# Altium PCB NSTRI.PcbDoc
Units mil, origin at the board's own origin, x right, y up, seen from the top; angles counter-clockwise.
Board outline 3582.68 x 2299.21 mil, 2 copper layers (Top Layer, Bottom Layer); 50 components, 49 nets, 246 pads, 54 vias.
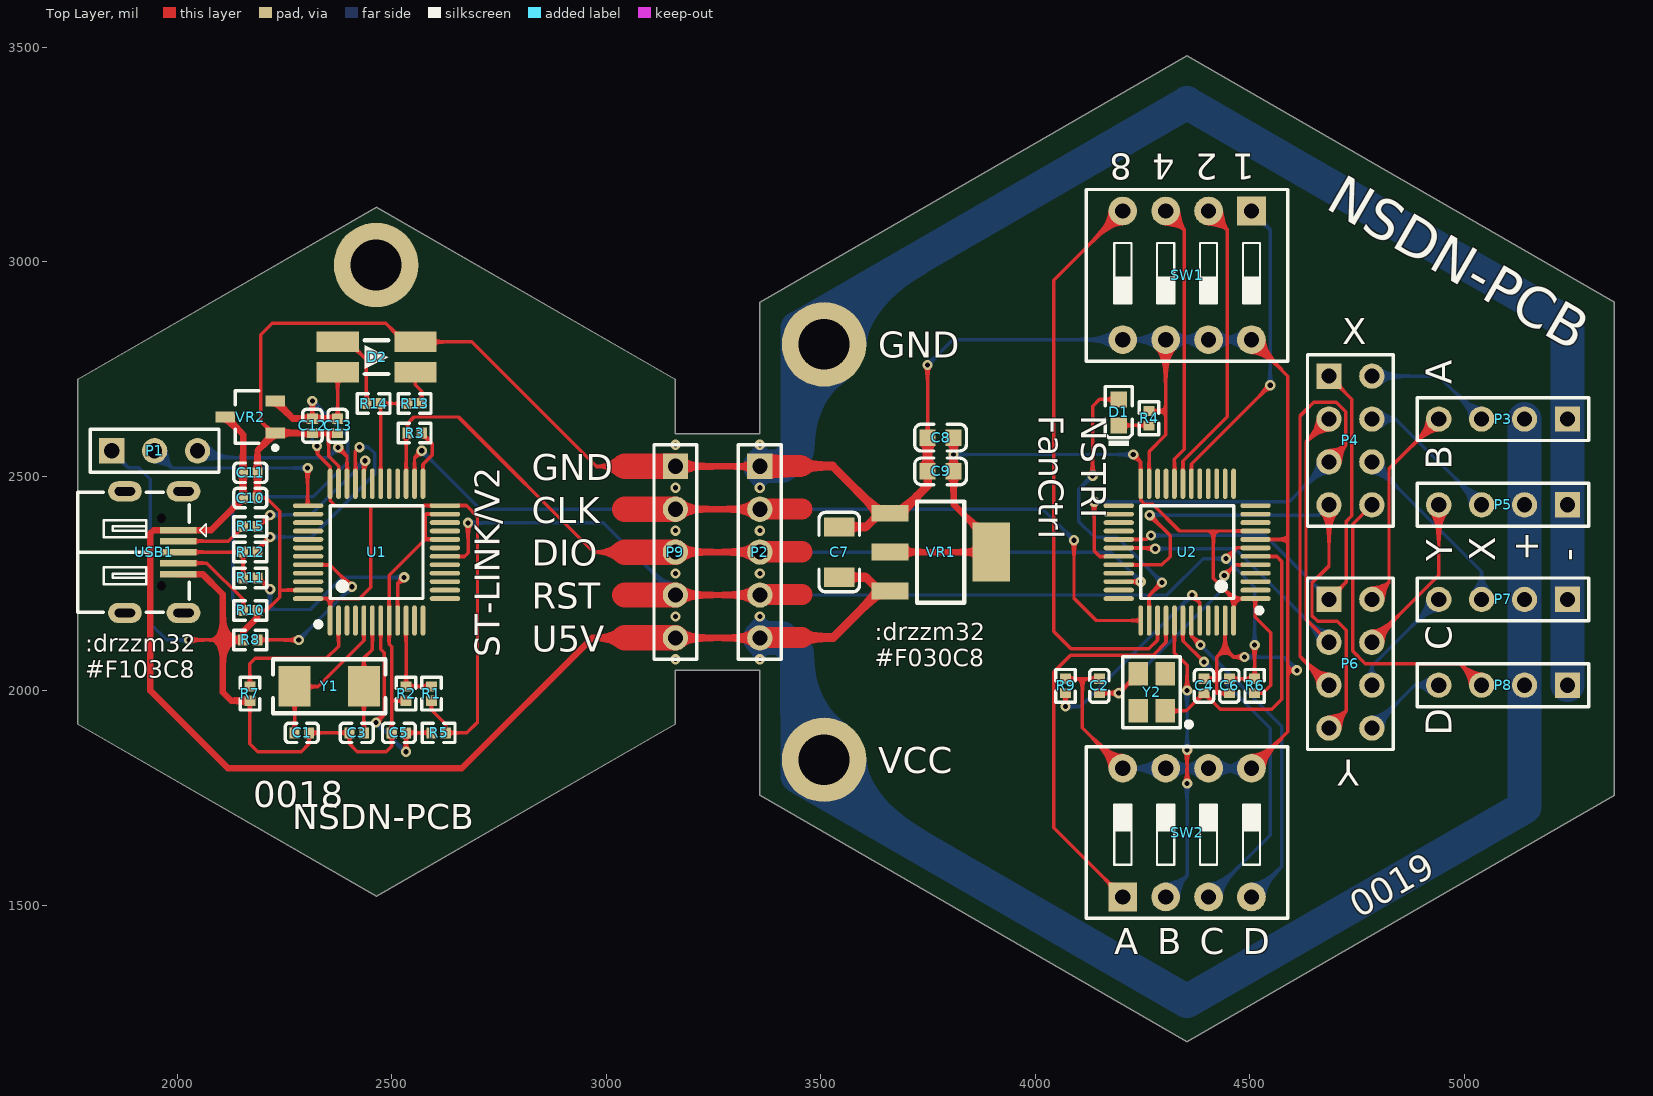
[diagram p0: Top Layer view]
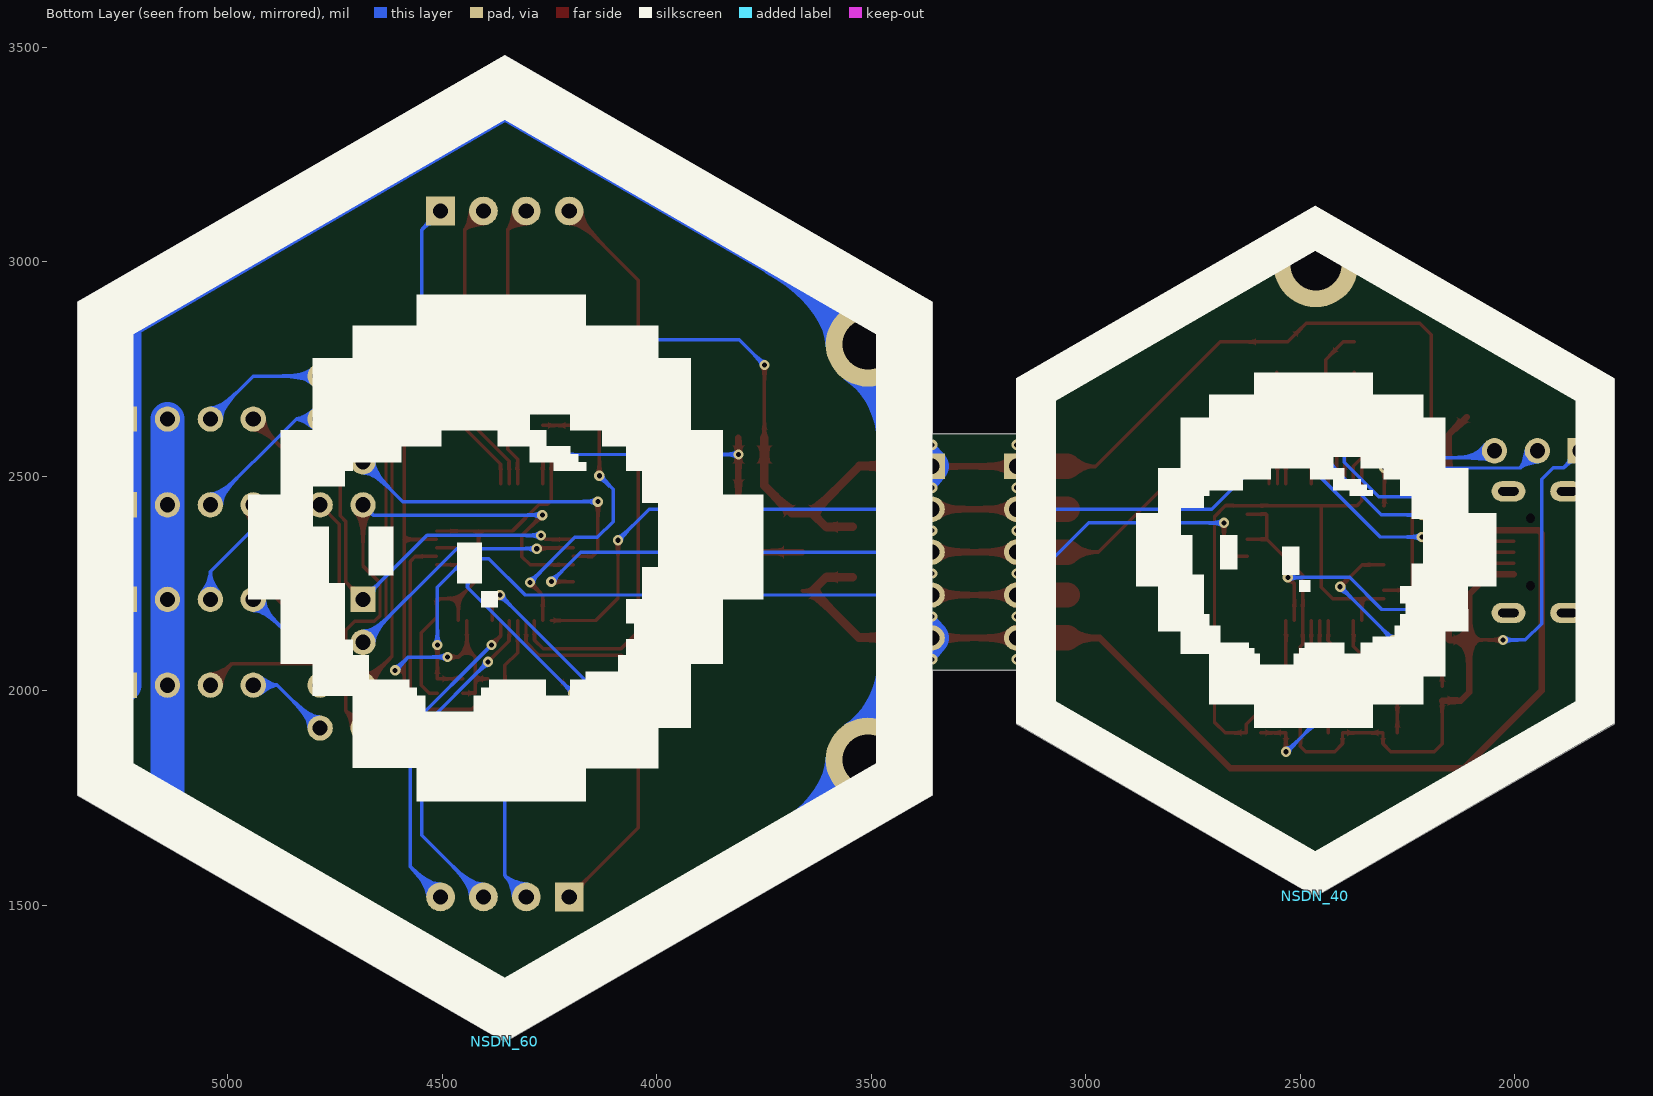
[diagram p1: Bottom Layer view, seen from below]
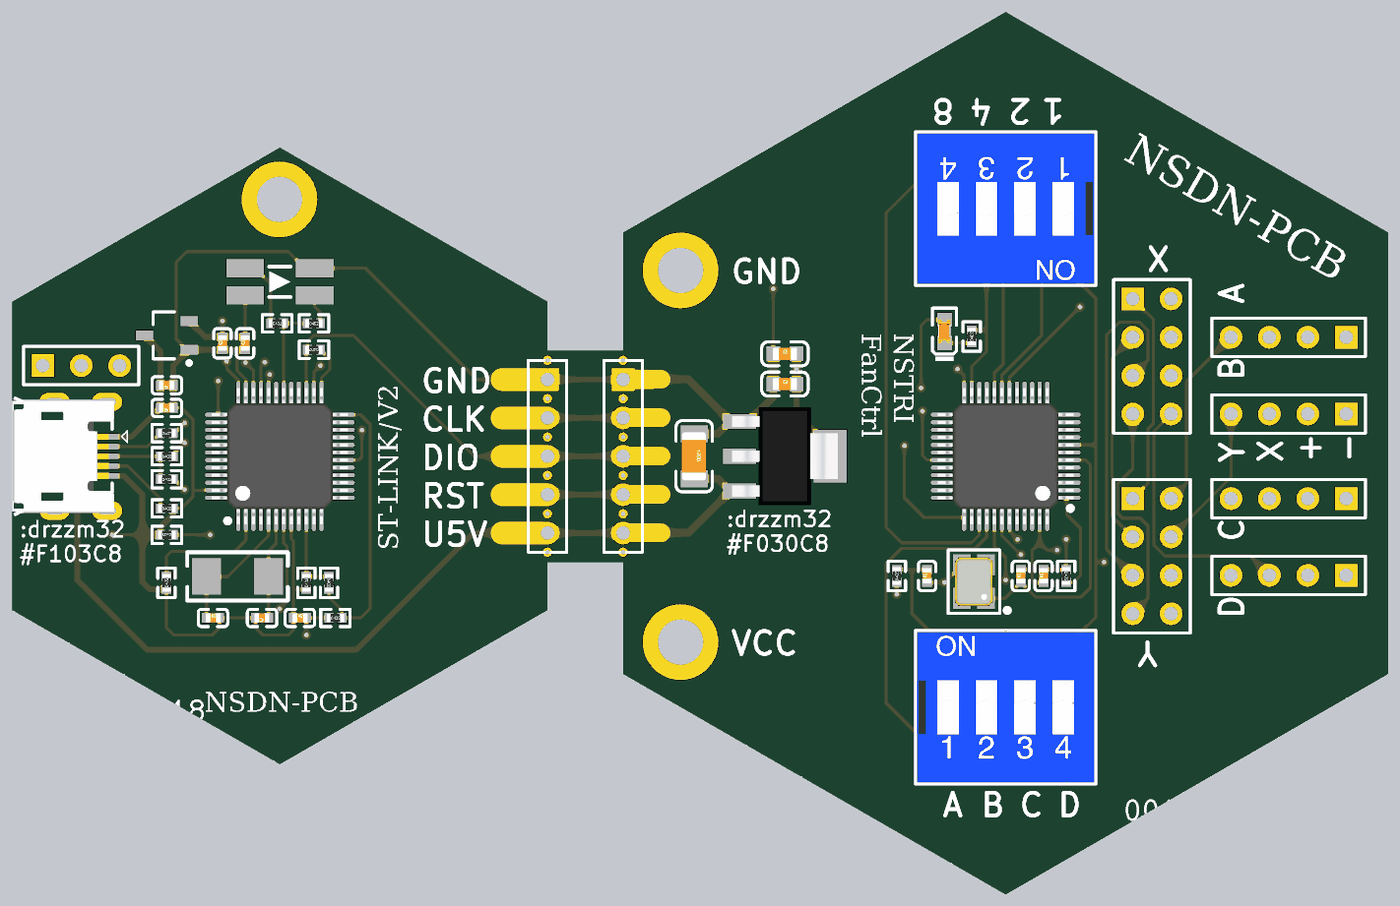
[diagram p2: 3D render of the assembled board from above, using the file's embedded part models]

## Layer stack, top to bottom
Top Solder: solder mask 0.4, Solder Resist, Dk 3.5
Top Layer: signal copper 1.4
Dielectric 1: dielectric 12.6, FR-4, Dk 4.8
Bottom Layer: signal copper 1.4
Bottom Solder: solder mask 0.4, Solder Resist, Dk 3.5

## Board outline
1767.72,1922.24 2464.57,1520.67 3161.42,1922.24 3161.42,2047.24 3358.27,2047.24 3358.27,1755.91 4354.33,1181.1 5350.39,1755.91 5350.39,2905.51 4354.33,3480.32 3358.27,2905.51 3358.27,2598.43 3161.42,2598.43 3161.42,2725.39 2464.57,3126.97 1767.72,2725.39

## Design rules (kind name [scope] priority, off if disabled: settings)
AssemblyTestpoint AssemblyTestpoint_4 [All] p2: testpointundercomponent=TRUE minsize=40 maxsize=100 preferedsize=60 minholesize=0 maxholesize=40 preferedholesize=32 testpointgrid=1 usegrid=TRUE gridtolerance=0.01 allowsidetop=TRUE allowsidebottom=TRUE
AssemblyTestpoint AssemblyTestpoint_3 [All] p3: testpointundercomponent=TRUE minsize=40 maxsize=100 preferedsize=60 minholesize=0 maxholesize=40 preferedholesize=32 testpointgrid=1 usegrid=TRUE gridtolerance=0.01 allowsidetop=TRUE allowsidebottom=TRUE
AssemblyTestpoint AssemblyTestpoint_2 [All] p4: testpointundercomponent=TRUE minsize=40 maxsize=100 preferedsize=60 minholesize=0 maxholesize=40 preferedholesize=32 testpointgrid=1 usegrid=TRUE gridtolerance=0.01 allowsidetop=TRUE allowsidebottom=TRUE
AssemblyTestpoint AssemblyTestpoint_1 [All] p5: testpointundercomponent=TRUE minsize=40 maxsize=100 preferedsize=60 minholesize=0 maxholesize=40 preferedholesize=32 testpointgrid=1 usegrid=TRUE gridtolerance=0.01 allowsidetop=TRUE allowsidebottom=TRUE
Clearance [All] p1: gap=6 ignorepadtopadclearanceinfootprint=FALSE
HoleSize [All] p1: absolutevalues=TRUE maxlimit=250 minlimit=11.81 maxpercent=80.000 minpercent=20.000
HoleToHoleClearance [All] p1: gap=18 allowstackedmicrovias=TRUE
MinimumSolderMaskSliver [All] p1: minsoldermaskwidth=6
PolygonConnect [All] p1: connectstyle=Relief reliefconductorwidth=10 reliefentries=4 polygonreliefangle="90 Angle" airgapwidth=10
RoutingCorners [All] p1: cornerstyle=Round minsetback=100 maxsetback=200
RoutingVias [All] p1: holewidth=12 width=24 viastyle="Through Hole" minholewidth=11.81 minwidth=23.62 maxholewidth=250 maxwidth=261.81
SilkToSilkClearance [All] p1: silktosilkclearance=6
SilkToSolderMaskClearance [IsPad] p1: minsilkscreentomaskgap=6 clearancetoexposedcopper=TRUE
SolderMaskExpansion [All] p1: expansion=2
UnRoutedNet [All] p1: checkbadconnections=TRUE
Width [All] p1: maxlimit=78.74 minlimit=6 preferedwidth=8
23 further rules are at their usual default settings.

## Components (designator, comment, footprint, x,y, rotation, side; value= is the part's Value field where it differs from the comment)
C1 "20pF (200) 5% 50V" 0402_C 2290.35,1901.58 r0 top
C2 "10pF (100) 5% 50V" 0402_C 4149.61,2010.83 r90 top
C3 "20pF (200) 5% 50V" 0402_C 2418.31,1901.58 r180 top
C4 "10pF (100) 5% 50V" 0402_C 4393.7,2010.83 r90 top
C5 "100nF (104) 10% 16V" 0402_C 2516.73,1901.58 r0 top
C6 "100nF (104) 10% 16V" 0402_C 4452.76,2010.83 r90 top
C7 "10uF (106) 10% 50V" 1206_C 3543.31,2322.83 r270 top
C8 "100nF (104) 10% 50V" 0603_C 3779.53,2589.76 r0 top
C9 "4.7uF (475) 10% 16V" 0603_C 3779.53,2511.02 r0 top
C10 "4.7uF (475) 20% 10V" 0402_C 2170.28,2448.82 r180 top
C11 "4.7uF (475) 20% 10V" 0402_C 2170.28,2507.87 r180 top
C12 "100nF (104) 10% 16V" 0402_C 2314.96,2617.13 r90 top
C13 "4.7uF (475) 20% 10V" 0402_C 2374.02,2617.13 r90 top
D1 "白灯 0603" 0603_LED_S1 4194.88,2648.43 r90 top
D2 "LED_BI" LED_BI 2464.57,2777.56 r180 top
NSDN_40 "Comment" NSDN_40mm_A 2464.57,1520.67 r180 bottom locked
NSDN_60 "Comment" NSDN_60MM 4354.29,1181.1 r180 bottom locked
P1 "STLK_SWD" HDR1X3 1847.24,2559.06 r0 top
P2 "TRI_CON" HDR1X5 3358.27,2522.83 r270 top
P3 "Fan1" HDR1X4 5240.94,2633.07 r180 top
P4 "Header 4X2" HDR2X4 4685.04,2733.07 r270 top
P5 "Fan2" HDR1X4 5240.94,2433.07 r180 top
P6 "Header 4X2" HDR2X4 4685.04,2212.6 r270 top
P7 "Fan3" HDR1X4 5240.94,2212.6 r180 top
P8 "Fan4" HDR1X4 5240.94,2012.6 r180 top
P9 "STLK_CON" HDR1X5 3161.42,2522.83 r270 top
R1 "4.7KΩ (4701) ±1%" 0402_R 2592.52,1993.11 r270 top
R2 "4.7KΩ (4701) ±1%" 0402_R 2533.46,1993.11 r90 top
R3 "100Ω (1000) ±1%" 0402_R 2553.15,2600.39 r180 top
R4 "1KΩ (1001) ±1%" 0402_R 4265.74,2634.84 r90 top
R5 "100KΩ (1003) ±1%" 0402_R 2609.25,1901.58 r0 top
R6 "100KΩ (1003) ±1%" 0402_R 4511.81,2010.83 r270 top
R7 "10KΩ (1002) ±1%" 0402_R 2169.29,1993.11 r90 top
R8 "100KΩ (1003) ±1%" 0402_R 2170.28,2118.11 r180 top
R9 "100KΩ (1003) ±1%" 0402_R 4070.87,2010.83 r90 top
R10 "100KΩ (1003) ±1%" 0402_R 2170.28,2187.01 r0 top
R11 "1.5KΩ (1501) ±1%" 0402_R 2170.28,2262.83 r0 top
R12 "22Ω (22R0) ±1%" 0402_R 2170.28,2322.83 r0 top
R13 "220Ω (2200) ±1%" 0402_R 2553.15,2669.29 r0 top
R14 "220Ω (2200) ±1%" 0402_R 2457.68,2669.29 r0 top
R15 "22Ω (22R0) ±1%" 0402_R 2170.28,2382.83 r0 top
SW1 "CSW-4P" "CSW DIP-4P" 4354.33,2968.11 r180 top
SW2 "CSW-4P" "CSW DIP-4P" 4354.33,1668.9 r0 top
U1 "STM32F103C8T6" LQFP-48_7x7x05P 2464.57,2322.83 r0 top
U2 "STM32F030C8T6" LQFP-48_7x7x05P 4354.33,2322.83 r90 top
USB1 "USB-5P" USB-MICRO_D 1877.95,2322.83 r270 top
VR1 "AMS1117-3.3" SOT-223 3779.53,2322.83 r180 top
VR2 "XC6206P332MR" SOT-23-3L 2170.28,2637.79 r0 top
Y1 "8MHz ±20ppm 20pF" SMD-5032_2P 2354.33,2009.84 r180 top
Y2 "16MHZ 9PF 10PPM" SMD-3225_4P 4271.65,1996.06 r90 top

## Footprints (in the part's own frame and the unit in brackets; to place one, negate y for a bottom-side part, rotate by r counter-clockwise, add the part's x,y. Pads: shape width x height; smd on the part's side, far side on the other; paste and mask are expansions set on the pad)
0402_C [mm]
  rect 0.6x0.65 smd mask+0.051: 1(-0.425,0) 2(0.425,0)
  silkscreen extent -0.98,-0.58 0.97,0.58, body extent -0.48,-0.3 0.52,0.3, height 0.2
0402_R [mm]
  rect 0.6x0.65 smd mask+0.051: 1(-0.425,0) 2(0.425,0)
  silkscreen extent -0.97,-0.57 0.98,0.58, body extent -0.57,-0.27 0.58,0.28, height 0.41
0603_C [mm]
  rect 0.93x0.98 smd: 1(-0.77,0) 2(0.77,0)
  silkscreen extent -1.54,-0.79 1.54,0.79, body extent -0.8,-0.4 0.8,0.4, height 0.3
0603_LED_S1 [mm]
  rect 0.93x0.98 smd: A(0.77,0) K(-0.77,0)
  silkscreen extent -1.98,-0.79 1.53,0.79, body extent -0.8,-0.4 0.8,0.4, height 0.6
1206_C [mm]
  rect 1.13x1.8 smd: 1(-1.49,0) 2(1.49,0)
  silkscreen extent -2.36,-1.2 2.36,1.2, body extent -1.6,-0.81 1.6,0.79, height 1
"CSW DIP-4P" [mm] "11.7*9.9*7mm"
  rect 1.7x1.7 hole 0.9: 1(-3.81,-3.81)
  round 1.7 hole 0.9: 2(-1.27,-3.81) 3(1.27,-3.81) 4(3.81,-3.81) 5(3.81,3.81) 6(1.27,3.81) 7(-1.27,3.81) 8(-3.81,3.81)
  silkscreen extent -5.97,-5.08 5.97,5.08, body extent -5.86,-4.95 5.86,4.95, height 6.65
HDR1X3 [mm] "Connector; Header; 3 Position"
  rect 1.5x1.5 hole 0.9: 1(0,0)
  round 1.5 hole 0.9: 2(2.54,0) 3(5.08,0)
  silkscreen extent -1.27,-1.27 6.35,1.27
HDR1X4 [mm] "Connector; Header; 4 Position"
  rect 1.5x1.5 hole 0.9: 1(0,0)
  round 1.5 hole 0.9: 2(2.54,0) 3(5.08,0) 4(7.62,0)
  silkscreen extent -1.27,-1.27 8.89,1.27
HDR1X5 [mm] "Connector; Header; 5 Position"
  rect 1.5x1.5 hole 0.9: 1(0,0)
  round 1.5 hole 0.9: 2(2.54,0) 3(5.08,0) 4(7.62,0) 5(10.16,0)
  silkscreen extent -1.27,-1.27 11.43,1.27
HDR2X4 [mm] "Connector; Header; 4x2 Position"
  rect 1.5x1.5 hole 0.9: 1(0,0)
  round 1.5 hole 0.9: 2(0,2.54) 3(2.54,0) 4(2.54,2.54) 5(5.08,0) 6(5.08,2.54) 7(7.62,0) 8(7.62,2.54)
  silkscreen extent -1.27,-1.27 8.89,3.81
LED_BI [mm]
  rect 2.5x1.2 smd: 1(-2.3,0.9) 2(2.3,0.9) 3(2.3,-0.9) 4(-2.3,-0.9)
  silkscreen extent -0.7,-1 0.7,1
LQFP-48_7x7x05P [mm]
  oval 0.28x1.8 smd mask+0.051: 1(-2.75,-4.05) 2(-2.25,-4.05) 3(-1.75,-4.05) 4(-1.25,-4.05) 5(-0.75,-4.05) 6(-0.25,-4.05) 7(0.25,-4.05) 8(0.75,-4.05) 9(1.25,-4.05) 10(1.75,-4.05) 11(2.25,-4.05) 12(2.75,-4.05) 25(2.75,4.05) 26(2.25,4.05) 27(1.75,4.05) 28(1.25,4.05) 29(0.75,4.05) 30(0.25,4.05) 31(-0.25,4.05) 32(-0.75,4.05) 33(-1.25,4.05) 34(-1.75,4.05) 35(-2.25,4.05) 36(-2.75,4.05)
  oval 1.8x0.28 smd mask+0.051: 13(4.05,-2.75) 14(4.05,-2.25) 15(4.05,-1.75) 16(4.05,-1.25) 17(4.05,-0.75) 18(4.05,-0.25) 19(4.05,0.25) 20(4.05,0.75) 21(4.05,1.25) 22(4.05,1.75) 23(4.05,2.25) 24(4.05,2.75) 37(-4.05,2.75) 38(-4.05,2.25) 39(-4.05,1.75) 40(-4.05,1.25) 41(-4.05,0.75) 42(-4.05,0.25) 43(-4.05,-0.25) 44(-4.05,-0.75) 45(-4.05,-1.25) 46(-4.05,-1.75) 47(-4.05,-2.25) 48(-4.05,-2.75)
  silkscreen extent -3.6,-4.42 2.75,2.75, body extent -4.5,-4.5 4.5,4.5, height 1.6
NSDN_40mm_A [mil]
  Top Layer region: -697,403
  Top Layer keep-out region: 0,0
  silkscreen extent -698,0 697,1610
NSDN_60MM [mil]
  silkscreen extent -996,0 996,2300
SMD-3225_4P [mm]
  rect 1.4x1.15 smd: 1(-1.1,-0.8) 2(1.1,-0.8) 3(1.1,0.8) 4(-1.1,0.8)
  silkscreen extent -2.1,-2.35 2.1,1.7, body extent -1.6,-1.25 1.6,1.25, height 0.61
SMD-5032_2P [mm]
  rect 1.9x2.4 smd: 1(-2.05,0) 2(2.05,0)
  silkscreen extent -3.32,-1.6 3.32,1.6
SOT-23-3L [mm] "http://www.aosmd.com/res/packaging_information/SOT-23-3L.pdf"
  rect 1.15x0.65 smd: 1(1.475,-0.95) 2(1.475,0.95) 3(-1.475,0)
  silkscreen extent -0.9,-1.95 1.6,1.55, body extent -0.9,-1.55 0.9,1.55, height 1.25
SOT-223 [mm]
  rect 2.2x1 smd: 1(3,-2.3) 2(3,0) 3(3,2.3)
  rect 2.2x3.5 smd: 2(-3,0)
  silkscreen extent -1.4,-3 1.4,3, body extent -3.49,-3.24 3.49,3.24, height 1.64
USB-MICRO_D [mm] "micro型USB ，6.7*7.5*2.5mm"
  oval 1.2x2 hole 0.5 slot 1.2 at 90 deg: 0(-3.6,3.47) 0(-3.6,0) 0(3.6,3.47) 0(3.6,0)
  round 0 hole 0.55 unplated: 0(-2,2.17) 0(2,2.17)
  rect 0.381x2.15 smd: 1(-1.3,3.16) 2(-0.65,3.16) 3(0,3.16) 4(0.65,3.16) 5(1.3,3.16)
  silkscreen extent -3.56,-2.79 3.56,4.81, body extent -3.99,-2.75 3.99,3.95, height 2.79

## Part data
C1 C3: library part "0402 20pF (200) 5% 50V", "贴片电容", Package=0402, SuppliersPartNumber=C1554, ComponentLink1Description=供应商, ComponentLink1URL=http://www.szlcsc.com/product/details_1906.html, Supplier=LC
C2 C4: library part "0402 10pF (100) 5% 50V", "贴片电容", Package=0402, SuppliersPartNumber=C32949, ComponentLink1Description=供应商, ComponentLink1URL=http://www.szlcsc.com/product/details_33914.html, Supplier=LC
C5 C6 C12: library part "0402 100nF (104) 10% 16V", "贴片电容", Package=0402, SuppliersPartNumber=C1525, ComponentLink1Description=供应商, ComponentLink1URL=http://www.szlcsc.com/product/details_1877.html, Supplier=LC
C7: library part "1206 10uF (106) 10% 50V", "贴片电容", Package=1206, SuppliersPartNumber=C13585, ComponentLink1Description=供应商, ComponentLink1URL=http://www.szlcsc.com/product/details_14236.html, Supplier=LC
C8: library part "0603 100nF (104) 10% 50V", "贴片电容", Package=0603, SuppliersPartNumber=C14663, ComponentLink1Description=供应商, ComponentLink1URL=http://www.szlcsc.com/product/details_15331.html, Supplier=LC
C9: library part "0603 4.7uF (475) 10% 16V", "贴片电容", Package=0603, SuppliersPartNumber=C19666, ComponentLink1Description=供应商, ComponentLink1URL=http://www.szlcsc.com/product/details_20375.html, Supplier=LC
C10 C11 C13: library part "0402 4.7uF (475) 20% 10V", "贴片电容", Package=0402, SuppliersPartNumber=C23733, ComponentLink1Description=供应商, ComponentLink1URL=http://www.szlcsc.com/product/details_24469.html, Supplier=LC
D1: library part "0603 白灯", "发光二极管", Package=0603, SuppliersPartNumber=C2290, ComponentLink1Description=供应商, ComponentLink1URL=http://www.szlcsc.com/product/details_2663.html, Supplier=LC
P1: library part "Header 3", "Header, 3-Pin", LatestRevisionDate=17-Jul-2002, LatestRevisionNote="Re-released for DXP Platform.", Publisher="Altium Limited"
P2 P9: library part "Header 5", "Header, 5-Pin", LatestRevisionDate=17-Jul-2002, LatestRevisionNote="Re-released for DXP Platform.", Publisher="Altium Limited"
P3 P5 P7 P8: library part "Header 4", "Header, 4-Pin", LatestRevisionDate=17-Jul-2002, LatestRevisionNote="Re-released for DXP Platform.", Publisher="Altium Limited"
P4 P6: "Header, 4-Pin, Dual row", LatestRevisionDate=17-Jul-2002, LatestRevisionNote="Re-released for DXP Platform.", Publisher="Altium Limited"
R1 R2: library part "0402 4.7KΩ (4701) 1%", "贴片电阻", Package=0402, SuppliersPartNumber=C25900, ComponentLink1Description=供应商, ComponentLink1URL=http://www.szlcsc.com/product/details_26643.html, Supplier=LC
R3: library part "0402 100Ω (1000) 1%", "贴片电阻", Package=0402, SuppliersPartNumber=C25076, ComponentLink1Description=供应商, ComponentLink1URL=http://www.szlcsc.com/product/details_25819.html, Supplier=LC
R4: library part "0402 1KΩ (1001) 1%", "贴片电阻", Package=0402, SuppliersPartNumber=C11702, ComponentLink1Description=供应商, ComponentLink1URL=http://www.szlcsc.com/product/details_12256.html, Supplier=LC
R5 R6 R8 R9 R10: library part "0402 100KΩ (1003) 1%", "贴片电阻", Package=0402, SuppliersPartNumber=C25741, ComponentLink1Description=供应商, ComponentLink1URL=http://www.szlcsc.com/product/details_26484.html, Supplier=LC
R7: library part "0402 10KΩ (1002) 1%", "贴片电阻", Package=0402, SuppliersPartNumber=C25744, ComponentLink1Description=供应商, ComponentLink1URL=http://www.szlcsc.com/product/details_26487.html, Supplier=LC
R11: library part "0402 1.5KΩ (1501) 1%", "贴片电阻", Package=0402, SuppliersPartNumber=C25867, ComponentLink1Description=供应商, ComponentLink1URL=http://www.szlcsc.com/product/details_26610.html, Supplier=LC
R12 R15: library part "0402 22Ω (22R0) 1%", "贴片电阻", Package=0402, SuppliersPartNumber=C25092, ComponentLink1Description=供应商, ComponentLink1URL=http://www.szlcsc.com/product/details_25835.html, Supplier=LC
R13 R14: library part "0402 220Ω (2200) 1%", "贴片电阻", Package=0402, SuppliersPartNumber=C25091, ComponentLink1Description=供应商, ComponentLink1URL=http://www.szlcsc.com/product/details_25834.html, Supplier=LC
SW1 SW2: "4路编码开关", BOM名称=4路编, 学习资源=www.ooocke.
U1 U2: "ARM", Package=LQFP-48_7x7x05P, SuppliersPartNumber=C8734, ComponentLink1Description=供应商, ComponentLink1URL=http://www.szlcsc.com/product/details_9243.html, Supplier=LC
USB1: "微型USB母座", BOM名称=微型US, 学习资源=www.ooocke.
VR1: library part "SOT-223 AMS1117-3.3", "低压差线性稳压(LDO)", Package=SOT-223, SuppliersPartNumber=C6186, ComponentLink1Description=供应商, ComponentLink1URL=http://www.szlcsc.com/product/details_6652.html, Supplier=LC
VR2: library part "SOT-23 XC6206P332MR", "低压差线性稳压(LDO)", Package=SOT-23, SuppliersPartNumber=C5446, ComponentLink1Description=供应商, ComponentLink1URL=http://www.szlcsc.com/product/details_5896.html, Supplier=LC
Y1: library part "SMD-5032_2P 8MHz 20ppm 20pF", "贴片晶振", Package=SMD-5032_2P, SuppliersPartNumber=C115962, ComponentLink1Description=供应商, ComponentLink1URL=http://www.szlcsc.com/product/details_117214.html, Supplier=LC
Y2: library part "SMD-3225_4P  16MHZ 9PF 10PPM", "贴片晶振", Package=SMD-3225_4P, SuppliersPartNumber=C13738, ComponentLink1Description=供应商, ComponentLink1URL=http://www.szlcsc.com/product/details_14393.html, Supplier=LC

## Free pads (board coordinates)
  round 196.85 hole 118.11: ""(2463.5,2992.13) ""(3507.87,1838.58) ""(3507.87,2807.09)

## Via types
v1: diameter 24, hole 12, Top Layer to Bottom Layer, tented both sides, 42 vias
v2: diameter 24, hole 12, Top Layer to Bottom Layer, 12 vias

## Nets (pads, with @x,y where several pads share a name; then routed paths per layer and width w, separated by ;. In a path a pad name is that pad's centre, name@x,y a point inside that pad or via, vN(x,y) a via of type N, cw(c..) or ccw(c..) an arc to the next point about the centre after c; other vN are vias at no path point)
3V3: C12.2 C13.2 D2.2 R1.2 R5.2 R11.2 U1.1 U1.9 U1.24 U1.36 U1.48 VR2.2 | length 3376.6
  Top Layer w8: R11.2 2189.92,2262.83 v1(2216.54,2236.22) ; U1.48 2356.3,2214.57 ; v1(2314.96,2675.2) C12.2 C13.2 D2.2 ; v1(2326,2570) 2326.5,2570 2327,2569.5 2327,2550.61 2356.3,2521.31 U1.36 2356.3,2442.47 2367.67,2431.1 2450.79,2431.1 ; U1.1 2356.3,2214.57 ; U1.9 2513.78,2248.78 v1(2529,2264) ; R1.2 2592.52,1955.46 2625.98,1922 R5.2 2675,1901.58 2700,1926.58 2700,2405.51 2674.41,2431.1 U1.24 2451,2431.1 2451,2241.35 2424.22,2214.57 2356.3,2214.57
  Top Layer w15: VR2.2 2269.69,2633.86 C12.2 C13.2
  Bottom Layer w8: v1(2216.54,2236.22) 2216.54,2189 ; v1(2326,2570) 2314.96,2581.04 v1(2314.96,2675.2) 2397,2593.15 2397,2532 2317,2452 2143.5,2452 2129,2437.5 2129,2210 2150,2189 2216.54,2189 ; v1(2529,2264) 2385,2264 2310,2189 2216.54,2189
F030_CLK: P2.2 P9.2 U1.26 U2.37 | length 2219.7
  Top Layer w8: U1.26 2553.15,2542.32 v1(2569.88,2559.06) ; v1(4090.55,2350.39) 4090.55,2214.83 4142,2163.39 U2.37
  Top Layer w15: P9.2 P2.2
  Top Layer w49.21: P2.2@3358.27,2423.62 3456.69,2423.62
  Top Layer w59.06: 3043.31,2422.83 P9.2
  Bottom Layer w8: v1(2569.88,2559.06) 2706.1,2422.83 P9.2 ; P2.2 4018.11,2422.83 v1(4090.55,2350.39)
F030_DIO: P2.3 P9.3 R3.2 U1.27 U2.34 | length 2165.7
  Top Layer w8: U1.27 2533.46,2597.44 R3.2 2536.42,2622.24 2551.97,2637.8 2655.64,2637.8 2970.6,2322.83 3043.31,2322.83 ; U2.34 v1(4246,2253.94)
  Top Layer w15: P9.3 P2.3
  Top Layer w49.21: P2.3@3358.27,2323.62 3456.69,2323.62
  Top Layer w59.06: 3043.31,2322.83 P9.3
  Bottom Layer w8: P2.3 4177.1,2322.83 v1(4246,2253.94)
F030_LED: D1.A U2.38 | length 703.6
  Top Layer w8: v1(4134,2501) 4134,2662.74 4150,2678.74 D1.A ; U2.38 4265.75,2221.75 v1(4296,2252)
  Bottom Layer w8: v1(4134,2501) 4102,2469 4102,2393.77 4138.77,2357 4191,2357 v1(4296,2252)
F030_RST: C6.2 P2.4 P9.4 R6.1 U1.18 U2.7 | length 2649.7
  Top Layer w8: U1.18 2670,2312.99 2678,2320.99 v1(2678,2391) ; v1(4445.18,2307.68) 4470.18,2332.68 U2.7 ; C6.2 R6.1 4511.81,2066.82 4511.7,2066.93 v1(4511.7,2106.3)
  Top Layer w15: P9.4 P2.4
  Top Layer w49.21: P2.4@3358.27,2223.62 3456.69,2223.62
  Top Layer w59.06: 3043.31,2222.83 P9.4
  Bottom Layer w8: v1(2678,2391) 2993.25,2391 P9.4 ; P2.4 4306.61,2222.83 4391.45,2307.68 v1@4433.32,2307.68 ; v1(4445.18,2307.68) 4511.7,2241.16 v1(4511.7,2106.3)
GND: C1.2 C2.2 C3.2 C4.2 C5.1 C6.1 C7.1 C8.1 C9.1 C10.1 C11.1 C12.1 C13.1 D2.4 P1.1 P2.1 P3.1 P5.1 P7.1 P8.1 P9.1 pad.@3507.87,2807.09 R2.1 R4.2 R7.1 R8.2 R9.2 R10.2 SW1.5 SW1.6 SW1.7 SW1.8 SW2.5 SW2.6 SW2.7 SW2.8 U1.8 U1.20 U1.23 U1.35 U1.47 U2.8 U2.23 U2.47 USB1.5 VR1.1 VR2.1 | length 12809.7
  Top Layer w8: v1(2027.56,2118.11) 2106.3,2118.11 R8.2@2142.5,2118.11 ; 2150,1976.38 R7.1 2169.29,1875.98 2187.78,1857.5 2288.6,1857.5 2307.09,1875.98 C1.2 C3.2 2401.57,1875.98 2420.06,1857.5 2487.5,1857.5 2500,1870 C5.1 2500,2102.36 2494.09,2108.27 U1.8 2494.09,2268.46 2578.5,2352.86 ; R10.2 2208,2187.01 2238.54,2217.54 2238.54,2234.25 U1.47 ; C10.1 2208.28,2448.82 2238.54,2418.56 2238.54,2236.24 ; C11.1 2187.01,2559.05 ; VR2.1@2223,2600 2195,2628 2195,2829.5 2221.8,2856.3 2486.22,2856.3 2529.53,2812.99 D2.4 2687.01,2812.99 2977.17,2522.83 3043.31,2522.83 ; VR2.1@2237.61,2600.39 C12.1 2353,2600.39 ; C13.1 2353,2600.39 ; U1.35 2375.98,2523.02 2353,2546 2353,2600.39 ; 2501,1976.38 R2.1 ; U1.23 2579,2411.42 2578,2410.42 2578,2353.36 ; C9.1 C8.1 v1(3749.21,2759.21) ; R9.2 4110.24,2027.56 ; C2.2 4110.24,2027.56 ; SW2.8 4110.24,1912.99 4110.24,2027.56 ; U2.23 4265.75,2557.42 4304.33,2596 4304.33,2651.57 ; R4.2 4304.33,2651.57 ; SW1.6 4304.33,2651.57 ; C4.2 4423.23,2027.56 ; U2.47 4442.91,2097.91 ; C6.1 4423.23,1994.09 4423.23,2027.56 ; v1(4488.19,2078.23) 4462.6,2078.23 4442.91,2097.91 ; SW2.5 4589.22,1903.78 4589.22,2047.24 ; SW1.8 4589.22,2733.22 4589.22,2352.36 ; U2.8 4589.22,2352.36 ; v1(4610.24,2047.24) 4589.22,2047.24 ; 2578,2353.36 2578.5,2352.86 ; 2578,2353.36 U1.20 2579,2352.36 2578.5,2352.86 ; 4423.23,2027.56 4423.23,2078.23 4442.91,2097.91 ; 4589.22,2047.24 4589.22,2352.36
  Top Layer w15: USB1.5 2059.06,2271.65 2106.3,2224.41 2106.3,2118.11 ; R7.1 2125.98,1976.38 2106.3,1996.06 2106.3,2118.11 ; R10.2 2187.01,2171.26 2153.54,2137.8 R8.2 2106.3,2118.11 ; C10.1 C11.1 2187.01,2559.05 VR2.1 C12.1 C13.1 ; P9.1 P2.1
  Top Layer w20: 3456.69,2523.62 3527.56,2523.62 VR1.1@3637.8,2413.39 ; C7.1 3605.91,2381.5 VR1.1@3637.8,2413.39 ; C8.1 C9.1 3749.21,2477.56 3685.04,2413.39 VR1.1 VR1.1@3637.8,2413.39
  Top Layer w49.21: P2.1@3358.27,2523.62 3456.69,2523.62
  Top Layer w59.06: 3043.31,2522.83 P9.1
  Bottom Layer w8: P1.1 1847.24,2558.27 1885.83,2519.68 1910.45,2519.68 1937.01,2493.13 1937.01,2156.3 1975.2,2118.11 v1(2027.56,2118.11) ; v1(3749.21,2759.21) 3808.11,2818.11 SW1.5 SW1.6 SW1.7 SW1.8 ; SW2.8 SW2.7 SW2.6 SW2.5 ; v1(4488.19,2078.23) 4579.25,2078.23 v1(4610.24,2047.24)
  Bottom Layer w15: v2(3358.27,2472.83) P2.1 v2(3358.27,2572.83)
  Bottom Layer w78.74: P2.1 3409.45,2522.83 3444.25,2557.64 3444.25,2558.27 ; 3444.57,2557.96 3444.25,2558.27 ; pad.@3445.64,2845.5 3445.64,2559.66 3444.25,2558.27 ; pad.@3445.92,2845.5 4354.33,3370.08 5240.94,2857.32 P3.1 P5.1 P7.1 P8.1
NetC1_1: C1.1 U1.5 Y1.2 | length 361.3
  Top Layer w8: C1.1 Y1.2@2273.62,2009 ; Y1.2 Y1.2@2273.62,2009 ; U1.5 2435.04,2116.14 2327.9,2009 Y1.2@2273.62,2009
NetC2_1: C2.1 U2.5 Y2.3 | length 568.4
  Top Layer w8: C2.1 v1(4194.88,1994.09) Y2.3 ; v1(4441,2268) 4466.31,2293.31 U2.5
  Bottom Layer w8: v1(4194.88,1994.09) 4441,2240.21 v1(4441,2268)
NetC3_1: C3.1 U1.6 Y1.1 | length 270
  Top Layer w8: C3.1 Y1.1 2435.04,2076 2454.72,2095.68 U1.6
NetC4_1: C4.1 U2.6 Y2.1 | length 701.7
  Top Layer w8: Y2.1 4352.36,1952.76 C4.1 4431.61,1956.18 4551.18,1956.18 4575,1980 4575,2300.99 4563,2312.99 U2.6
NetC5_2: C5.2 R5.1 U1.7 | length 451.1
  Top Layer w8: v1(2463.5,1925.5) 2483,1945 2483,2087.87 2474.41,2096.46 U1.7 ; v1(2533.46,1857.28) C5.2 R5.1
  Bottom Layer w8: v1(2463.5,1925.5) 2531.72,1857.28 v1(2533.46,1857.28)
NetD1_K: D1.K R4.1 | length 70.9
  Top Layer w8: D1.K R4.1
NetD2_1: D2.1 R13.2 | length 78.9
  Top Layer w8: D2.1 2555.12,2712.76 2569.88,2698 R13.2
NetD2_3: D2.3 R14.1 | length 186.4
  Top Layer w8: D2.3 2399.61,2812.99 2440.94,2771.65 R14.1
NetP3_3: P3.3 P4.2 | length 297.3
  Bottom Layer w8: P4.2 4940.94,2733.07 P3.3
NetP3_4: P3.4 P6.2 | length 485
  Top Layer w8: P6.2 4825,2252.56 4825,2517.13 P3.4
NetP4_4: P4.4 P5.3 | length 338.7
  Bottom Layer w8: P4.4 4840.94,2633.07 P5.3
NetP4_6: P4.6 P7.3 | length 426.5
  Bottom Layer w8: P4.6 5040.94,2277.17 P7.3
NetP4_8: P4.8 P8.3 | length 693.1
  Top Layer w8: P4.8 4740.16,2388.19 4740.16,2092.34 4769.51,2062.99 4990.55,2062.99 P8.3
NetP5_4: P5.4 P6.4 | length 385
  Top Layer w8: P6.4 4940.94,2268.5 P5.4
NetP6_6: P6.6 P7.4 | length 264.6
  Bottom Layer w8: P6.6 4785.04,2056.69 P7.4
NetP6_8: P6.8 P8.4 | length 197.3
  Bottom Layer w8: P6.8 4885.04,2012.6 P8.4
NetR1_1: R1.1 R2.2 U1.10 | length 212.6
  Top Layer w8: U1.10 R2.2 R1.1
NetR3_1: R3.1 U1.25 | length 137.3
  Top Layer w8: R3.1 2594.49,2575.79 2594.49,2549.21 2572.83,2527.56 U1.25
NetR7_2: R7.2 U1.2 | length 336.2
  Top Layer w8: R7.2 2169.29,2062.5 2181.79,2075 2347.5,2075 2375.98,2103.48 U1.2
NetR8_1: R8.1 U1.44 | length 394.4
  Top Layer w8: R8.1 v1(2283.11,2118.11) ; U1.44 2355.69,2293.31 v1(2407,2242)
  Bottom Layer w8: v1(2283.11,2118.11) v1(2407,2242)
NetR9_1: R9.1 U2.44 | length 500.9
  Top Layer w8: v1(4070.87,1963) R9.1 ; v1(4366,2223) 4383.86,2205.14 U2.44
  Bottom Layer w8: v1(4070.87,1963) 4106,1963 v1(4366,2223)
NetR10_1: R10.1 USB1.4 | length 211.8
  Top Layer w8: USB1.4 2068.9,2297.24 2153.54,2212.6 R10.1
NetR11_1: R11.1 R12.1 USB1.3 | length 211.2
  Top Layer w8: USB1.3 R12.1 R11.1
NetR15_1: R15.1 USB1.2 | length 165.4
  Top Layer w8: USB1.2 2119.13,2348.43 R15.1
NetSW1_1: SW1.1 U2.18 | length 730.1
  Top Layer w8: U2.18 4364.17,2528 v1(4548,2711.83)
  Bottom Layer w8: SW1.1 4548,3074.44 v1(4548,2711.83)
NetSW1_2: SW1.2 U2.19 | length 696.8
  Top Layer w8: U2.19 4344.49,2534.49 4448,2638 4448,3074.44 SW1.2
NetSW1_3: SW1.3 U2.20 | length 663.5
  Top Layer w8: SW1.3 4348,3074.44 4348,2563 4324.8,2539.8 U2.20
NetSW1_4: SW1.4 U2.39 | length 1359.7
  Top Layer w8: SW1.4 4043.31,2957.09 4043.31,2137.8 4083.62,2097.48 4264.92,2097.48 4285.43,2118 U2.39
NetSW2_1: SW2.1 U2.40 | length 932.5
  Top Layer w8: SW2.1 4043.31,1679.92 4043.31,2043.31 4082.5,2082.5 4275.12,2082.5 4305.12,2112.5 U2.40
NetSW2_2: SW2.2 U2.41 | length 677.4
  Top Layer w8: U2.41 4324.8,2088.2 4354.33,2058.67 v1(4354.33,2000) ; v1(4354.33,1783.46) v1(4354.33,1862.2)
  Bottom Layer w8: SW2.2 4354.33,1568.9 v1(4354.33,1783.46) ; v1(4354.33,1862.2) v1(4354.33,2000)
NetSW2_3: SW2.3 U2.42 | length 788.3
  Top Layer w8: U2.42 4344.49,2116.14 v1(4393.7,2066.93)
  Bottom Layer w8: v1(4393.7,2066.93) 4548,1912.63 4548,1662.57 SW2.3
NetSW2_4: SW2.4 U2.43 | length 760.9
  Top Layer w8: U2.43 4364.17,2127.57 v1(4385.44,2106.3)
  Bottom Layer w8: v1(4385.44,2106.3) 4574.8,1916.94 4574.8,1589.37 SW2.4
PWM_CH1: P4.1 P6.1 U2.29 | length 1120.7
  Top Layer w8: U2.29 4260.58,2352.36 v1(4270,2361.78) ; P6.1 4725,2252.56 4725,2394.29 4738.57,2407.86 4738.57,2679.54 P4.1
  Bottom Layer w8: v1(4270,2361.78) 4535.86,2361.78 P6.1
PWM_CH2: P4.3 P6.3 U2.30 | length 1146.1
  Top Layer w8: U2.30 4278.03,2332.68 v1(4280,2330.71) ; P6.3 4631.51,2166.13 4631.51,2579.54 P4.3
  Bottom Layer w8: v1(4280,2330.71) 4466.93,2330.71 P6.3
PWM_CH3: P4.5 P6.5 U2.31 | length 1682.1
  Top Layer w8: v1(4137.5,2440.5) 4137.5,2325.49 4150,2312.99 U2.31 ; P6.5 4617.51,2080.13 4617.51,2640.11 4650,2672.6 4701.97,2672.6 4724.57,2650 4724.57,2572.6 P4.5
  Bottom Layer w8: v1(4137.5,2440.5) 4592.47,2440.5 P4.5
PWM_CH4: P4.7 P6.7 U2.32 | length 1285.2
  Top Layer w8: U2.32 4295.47,2293.31 4314.5,2312.34 4314.5,2361.5 v1(4267,2409) ; P6.7 4725,1952.56 4725,2141.14 4704.72,2161.42 4658.65,2161.42 4645.51,2174.56 4645.51,2251 4685.04,2290.53 P4.7
  Bottom Layer w8: v1(4267,2409) 4660.97,2409 P4.7
ST_LED: R13.1 R14.2 U1.30 | length 249
  Top Layer w8: U1.30 R14.2 R13.1
SWCLK: P1.2 U1.37 | length 462.4
  Top Layer w8: v1(2304,2519) 2304,2431.1 U1.37
  Bottom Layer w8: P1.2 1987.3,2519 v1(2304,2519)
SWDIO: P1.3 U1.34 | length 437.4
  Top Layer w8: v1(2375,2567) 2395.67,2546.33 U1.34
  Bottom Layer w8: P1.3 2062.99,2543.31 2351.31,2543.31 v1(2375,2567)
U5V: C7.2 C10.2 C11.2 P2.5 P3.2 P5.2 P7.2 P8.2 P9.5 pad.@3507.87,1838.58 USB1.1 VR1.3 VR2.3 | length 6293.8
  Top Layer w8: C7.2 3586,2264.17 ; VR1.3@3637.8,2232.28 VR1.3
  Top Layer w15: VR2.3 2153.54,2596.46 C11.2 C10.2 2078.74,2374.02 USB1.1 1944.88,2374.02 1937.01,2366.14 1937.01,2000 2118.11,1818.9 2663.51,1818.9 2967.45,2122.83 3043.31,2122.83 ; P9.5 P2.5
  Top Layer w20: 3456.69,2123.62 3529.13,2123.62 3637.8,2232.28 3605.91,2264.17 C7.2
  Top Layer w49.21: P2.5@3358.27,2123.62 3456.69,2123.62
  Top Layer w59.06: 3043.31,2122.83 P9.5
  Bottom Layer w15: v2(3358.27,2072.83) P2.5 v2(3358.27,2172.83)
  Bottom Layer w78.74: P2.5 3409.45,2122.83 3444.57,2087.71 3444.25,2087.4 3445.55,1800.38 4354.33,1275.59 5140.94,1728.35 P8.2 P7.2 P5.2 P3.2
USB_DM: R15.2 U1.32 | length 369.4
  Top Layer w8: R15.2 2189.92,2382.83 v1(2216.54,2409.45) ; U1.32 2435.04,2533.04 v1(2438,2536)
  Bottom Layer w8: v1(2216.54,2409.45) 2311.45,2409.45 v1(2438,2536)
USB_DP: R12.2 U1.33 | length 557.5
  Top Layer w8: R12.2 2187.01,2328.51 v1(2216.54,2358.04) ; U1.33 2415.35,2558 v1(2425,2567.65) ; v1(2216.54,2358.04) 2222.19,2363.7 2222.19,2352.38 v1(2216.54,2358.04)
  Bottom Layer w8: v1(2216.54,2358.04) 2313.04,2358.04 2460,2505 2460,2553 2445.35,2567.65 v1(2425,2567.65)
VCC: C8.2 C9.2 R6.2 U2.1 U2.9 U2.24 U2.48 VR1.2 | length 1989.8
  Top Layer w8: C9.2 v1(3809.84,2550.39) C8.2 ; v1(4228.74,2550.39) 4246.06,2533.07 U2.24 4246.06,2443.26 4255,2434.32 4274.32,2434.32 4336.6,2372.05 4415.5,2372.05 ; U2.48 4462.6,2214.57 ; R6.2 4530.59,1994.09 4549,2012.5 4549,2135 4513,2171 U2.1@4513,2214.57 ; U2.1 U2.1@4513,2214.57 ; U2.9 4415.5,2372.05 ; 4415.5,2372.05 4415.5,2261.67 4462.6,2214.57 ; 4462.6,2214.57 U2.1@4513,2214.57
  Top Layer w15: VR1.2@3661.42,2322.83 3897.64,2322.83 3897.64,2346.46 3809.84,2434.25 C9.2 C8.2
  Bottom Layer w8: v1(3809.84,2550.39) v1(4228.74,2550.39)
pads on no net: U1.3 U1.4 U1.11 U1.12 U1.13 U1.14 U1.15 U1.16 U1.17 U1.19 U1.21 U1.22 U1.28 U1.29 U1.31 U1.38 U1.39 U1.40 U1.41 U1.42 U1.43 U1.45 U1.46 U2.2 U2.3 U2.4 U2.10 U2.11 U2.12 U2.13 U2.14 U2.15 U2.16 U2.17 U2.21 U2.22 U2.25 U2.26 U2.27 U2.28 U2.33 U2.35 U2.36 U2.45 U2.46 USB1.0 Y2.2 Y2.4
copper on no net:
  other v2: 3161.42,2072.83 3161.42,2172.83 3161.42,2272.83 3358.27,2272.83 3161.42,2372.83 3358.27,2372.83 3161.42,2472.83 3161.42,2572.83

## Silkscreen, mask and mechanical layers (free items; w line width, h text height)
Top Overlay:
  text "8" at 4226.06,3251.97 h60 r180
  text "4" at 4326.06,3251.97 h60 r180
  text "2" at 4426.06,3251.97 h60 r180
  text "1" at 4511.81,3251.97 h60 r180
  text "NSDN-PCB" at 4657.48,3098.43 h160 r330
  text "X" at 4716.54,2807.09 h60
  text "GND" at 3633.86,2775.59 h60
  text "A" at 4971.46,2714.76 h60 r90
  text "NSTRI / FanCtrl" at 3988.19,2641.73 h100 r270
  text "B" at 4971.46,2514.76 h60 r90
  text "GND" at 2826.77,2490.55 h60
  text "CLK" at 2826.77,2390.55 h60
  text "Y" at 4972.44,2301.18 h60 r90
  text "X" at 5072.44,2301.18 h60 r90
  text "+" at 5172.44,2301.18 h60 r90
  text "-" at 5272.44,2301.18 h60 r90
  text "DIO" at 2826.77,2290.55 h60
  text "RST" at 2826.77,2190.55 h60
  text "C" at 4971.46,2094.29 h60 r90
  text "U5V" at 2826.77,2090.55 h60
  text "ST-LINK/V2" at 2771.65,2078.23 h100 r90
  text ":drzzm32 / #F030C8" at 3625.98,2057.09 h40
  text ":drzzm32 / #F103C8" at 1785.43,2030.51 h40
  text "D" at 4971.46,1894.29 h60 r90
  text "Y" at 4755.91,1838.58 h60 r180
  text "VCC" at 3633.86,1807.09 h60
  text "0018" at 2177.17,1728.35 h60
  text "NSDN-PCB" at 2267.72,1657.48 h100
  text "0019" at 4755.91,1468.5 h60 r30
  text "A" at 4184.33,1385.83 h60
  text "B" at 4284.33,1385.83 h60
  text "C" at 4384.33,1385.83 h60
  text "D" at 4484.33,1385.83 h60
Top Solder:
  lines w49.21: 3358.27,2122.83 3456.69,2122.83 ; 3358.27,2222.83 3456.69,2222.83 ; 3358.27,2322.83 3456.69,2322.83 ; 3358.27,2422.83 3456.69,2422.83 ; 3358.27,2522.83 3456.69,2522.83
  lines w59.06: 3043.31,2122.83 3161.42,2122.83 ; 3043.31,2222.83 3161.42,2222.83 ; 3043.31,2322.83 3161.42,2322.83 ; 3043.31,2422.83 3161.42,2422.83 ; 3043.31,2522.83 3161.42,2522.83
Bottom Solder:
  lines w59.06: 3358.27,2122.83 3409.45,2122.83 3444.57,2087.71 3444.25,2087.4 3445.55,1800.38 4354.33,1275.59 5140.94,1728.35 5140.94,2012.6 5140.94,2212.6 5140.94,2433.07 5140.94,2633.07 ; 3358.27,2522.83 3409.45,2522.83 3444.25,2557.64 3444.25,2558.27 ; 3444.57,2557.96 3444.25,2558.27 ; 3445.64,2845.5 3445.64,2559.66 3444.25,2558.27 ; 3445.92,2845.5 4354.33,3370.08 5240.94,2857.32 5240.94,2633.07 5240.94,2433.07 5240.94,2212.6 5240.94,2012.6
Mechanical 1:
  the board outline again, w6
Drill Drawing:
  text "'.Legend'" at 6377.95,6338.58 h60